# Altium PCB 0033.PcbDoc
Units mm, origin at the board's own origin, x right, y up, seen from the top; angles counter-clockwise.
Board outline 152.4 x 101.6 mm, 2 copper layers (Top Layer, Bottom Layer); 9 components, 5 nets, 18 pads, 18 vias.
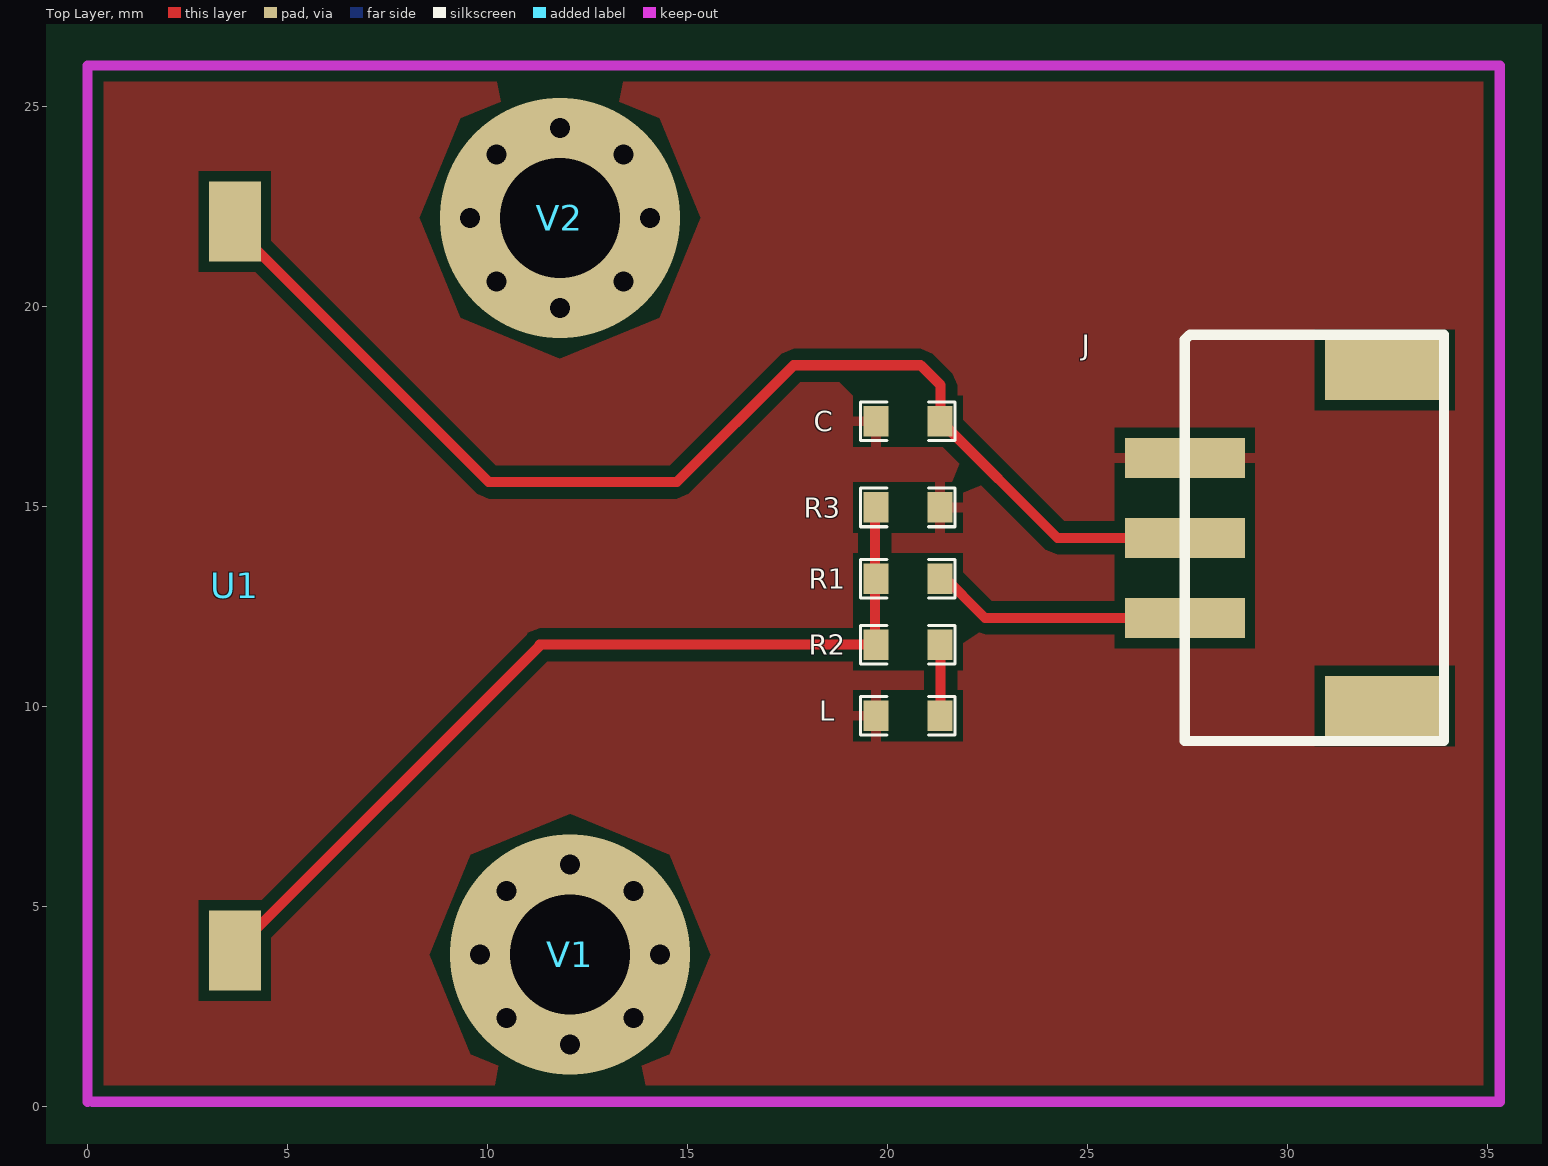
[diagram p0: Top Layer view]
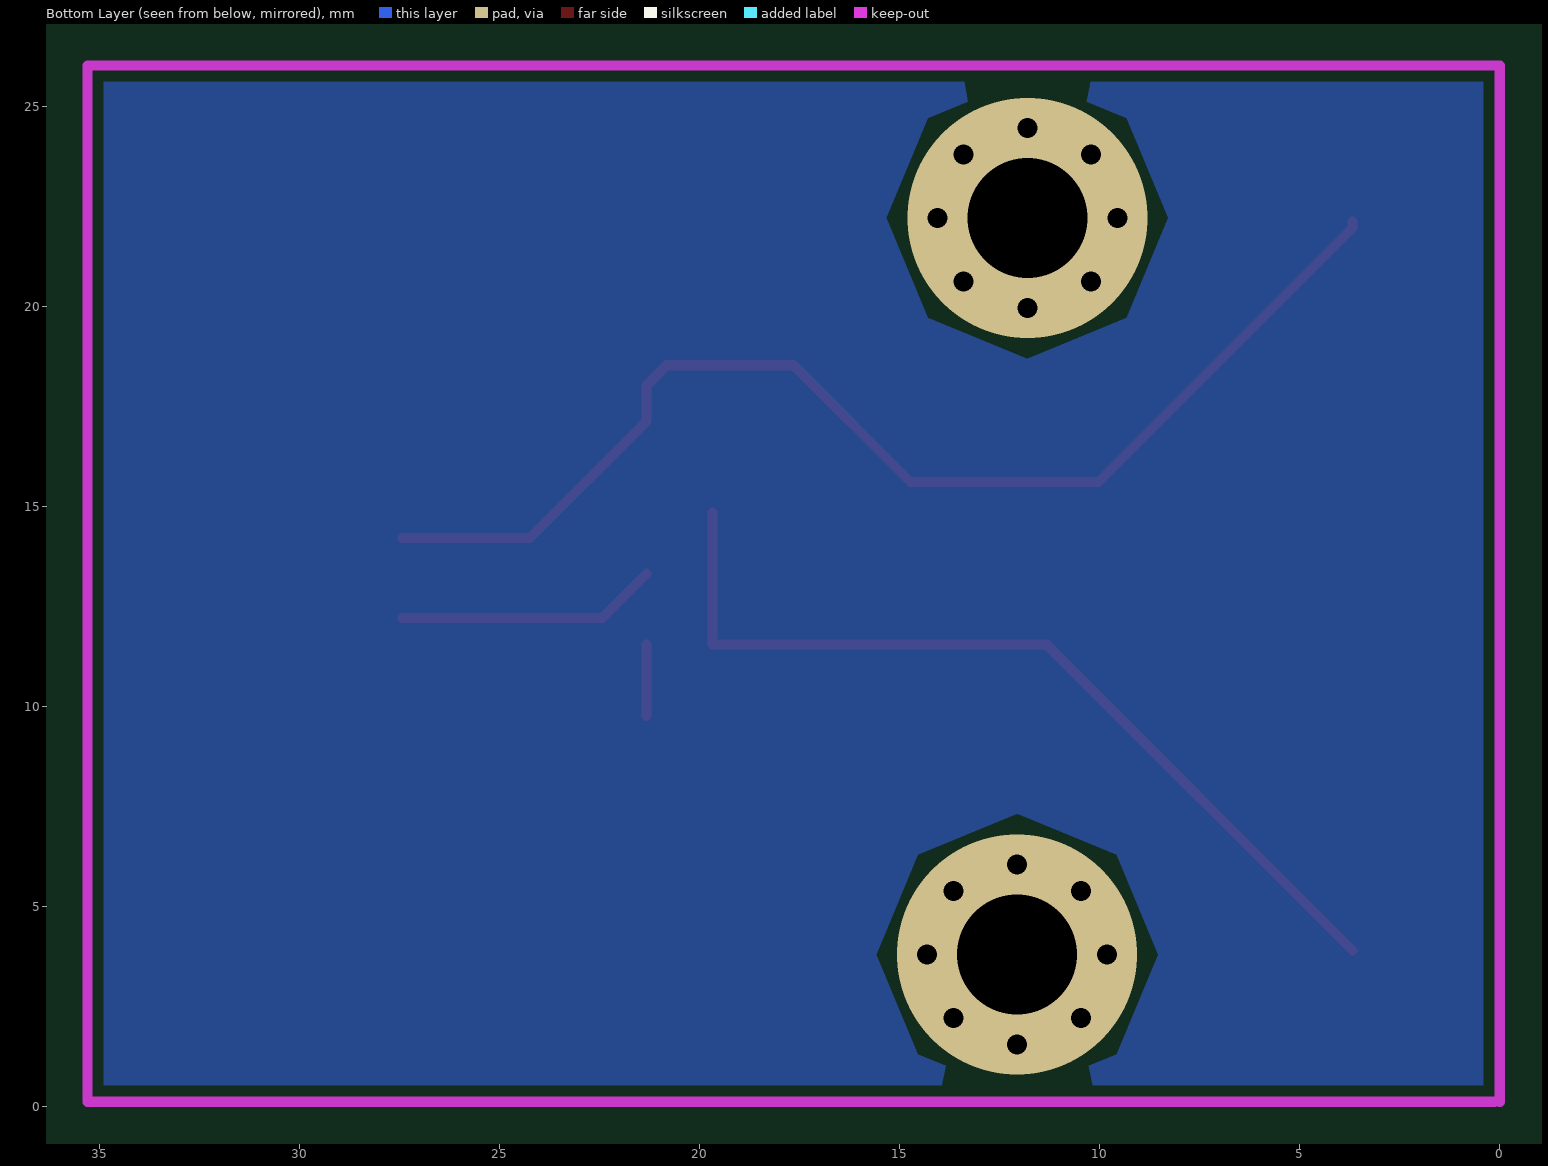
[diagram p1: Bottom Layer view, seen from below]

## Layer stack, top to bottom
Top Layer: signal copper 0.0356
Dielectric: dielectric 0.32, FR-4, Dk 4.8
Bottom Layer: signal copper 0.0356

## Board outline
-62.103,-39.751 90.297,-39.751 90.297,61.849 -62.103,61.849

## Design rules (kind name [scope] priority, off if disabled: settings)
Clearance [All] p1: gap=0.254
PolygonConnect [All] p1: connectstyle=Relief reliefconductorwidth=0.254 reliefentries=4 polygonreliefangle="90 Angle"
RoutingVias [All] p1: holewidth=0.711 width=1.27 viastyle="Through Hole" minholewidth=0.711 minwidth=1.27 maxholewidth=0.711 maxwidth=1.27
SilkscreenOverComponentPads [All] p1: minsilkscreentomaskgap=0.254
SolderMaskExpansion [All] p1: expansion=0.102
Width [All] p1: maxlimit=0.254 minlimit=0.254 preferedwidth=0.254
27 further rules are at their usual default settings.

## Classes and differential pairs
component class 0033: J U1 V2

## Components (designator, comment, footprint, x,y, rotation, side; value= is the part's Value field where it differs from the comment)
C "Comment" 0603E 19.812,17.145 r0 top
J "sh-2.0" sh-2.0 27.432,14.224 r90 top
L "Comment" 0603E 19.812,9.779 r0 top
R1 "Comment" 0603E 19.812,13.208 r0 top
R2 "Comment" 0603E 19.812,11.557 r0 top
R3 "Comment" 0603E 19.812,14.986 r0 top
U1 "RA-901" RA-901 3.683,3.937 r90 top
V1 "Via" Via 12.065,3.81 r0 top
V2 "Via" Via 11.811,22.225 r0 top

## Footprints (in the part's own frame and the unit in brackets; to place one, negate y for a bottom-side part, rotate by r counter-clockwise, add the part's x,y. Pads: shape width x height; smd on the part's side, far side on the other; paste and mask are expansions set on the pad)
0603E [mm]
  rect 0.635x0.762 smd: 1(-0.1,0) 2(1.5,0)
  silkscreen extent -0.48,-0.48 1.88,0.48
RA-901 [mm]
  rect 2x1.3 smd: 1(-0.025,0) 2(18.2,0)
sh-2.0 [mm]
  rect 1x3 smd: 1(-2,0) 2(0,0) 3(2,0) 3(2,0)
  rect 1.5x3 smd: GND(-4.2,-5) GND(4.2,-5)
  silkscreen extent -5.08,-6.48 5.08,0
Via [mm]

## Via types
v1: diameter 1, hole 0.5, Top Layer to Bottom Layer, 16 vias
v2: diameter 6, hole 3, Top Layer to Bottom Layer, 2 vias

## Nets (pads, with @x,y where several pads share a name; then routed paths per layer and width w, separated by ;. In a path a pad name is that pad's centre, name@x,y a point inside that pad or via, vN(x,y) a via of type N, cw(c..) or ccw(c..) an arc to the next point about the centre after c; other vN are vias at no path point)
GND: C.1 J.3 L.1 R3.2
NetJ_1: J.1 R1.2 | length 6.6
  Top Layer w0.254: R1.2@21.328,13.335 22.439,12.224 J.1
NetL_2: L.2 R2.2 | length 1.8
  Top Layer w0.254: L.2@21.328,9.779 R2.2@21.328,11.557
NetR1_1: R1.1 R2.1 R3.1 U1.1 | length 22.5
  Top Layer w0.254: U1.1 11.303,11.532 11.303,11.557 19.685,11.557 R3.1@19.685,14.859
VCC: C.2 J.2 U1.2 | length 30.1
  Top Layer w0.254: U1.2 3.683,21.971 10.033,15.621 14.732,15.621 17.653,18.542 20.828,18.542 21.328,18.042 21.328,17.145 24.249,14.224 J.2
pads on no net: J.GND
copper on no net:
  other v1: 12.065,1.56 10.474,2.219 13.656,2.219 9.815,3.81 14.315,3.81 10.474,5.401 13.656,5.401 12.065,6.06 11.811,19.975 10.22,20.634 13.402,20.634 9.561,22.225 14.061,22.225 10.22,23.816 13.402,23.816 11.811,24.475
  other v2: 12.065,3.81 11.811,22.225

## Polygon pours and split planes (outlines as drawn)
GND on Top Layer "Top Layer-No Net" (solid, pour order 4): 0,26.035 35.306,26.035 35.306,0.127 0,0.127
GND on Bottom Layer "Top Layer-No Net" (solid, pour order 6): 0,26.035 35.306,26.035 35.306,0.127 0,0.127

## Keep-outs
Keep-Out Layer:
  lines w0.254: 0,0.127 0,26.035 35.306,26.035 35.306,0.127 0.127,0.127

## Silkscreen, mask and mechanical layers (free items; w line width, h text height)
Top Solder:
  text "Magnetic" at 18.034,3.429 h0.76
  text "Sensor V2" at 17.526,2.032 h0.76